# Altium PCB PCB1.PcbDoc
Units mm, origin at the board's own origin, x right, y up, seen from the top; angles counter-clockwise.
Board outline 156.8 x 159.97 mm, 2 copper layers (Top Layer, Bottom Layer); 29 components, 22 nets, 99 pads, 0 vias.
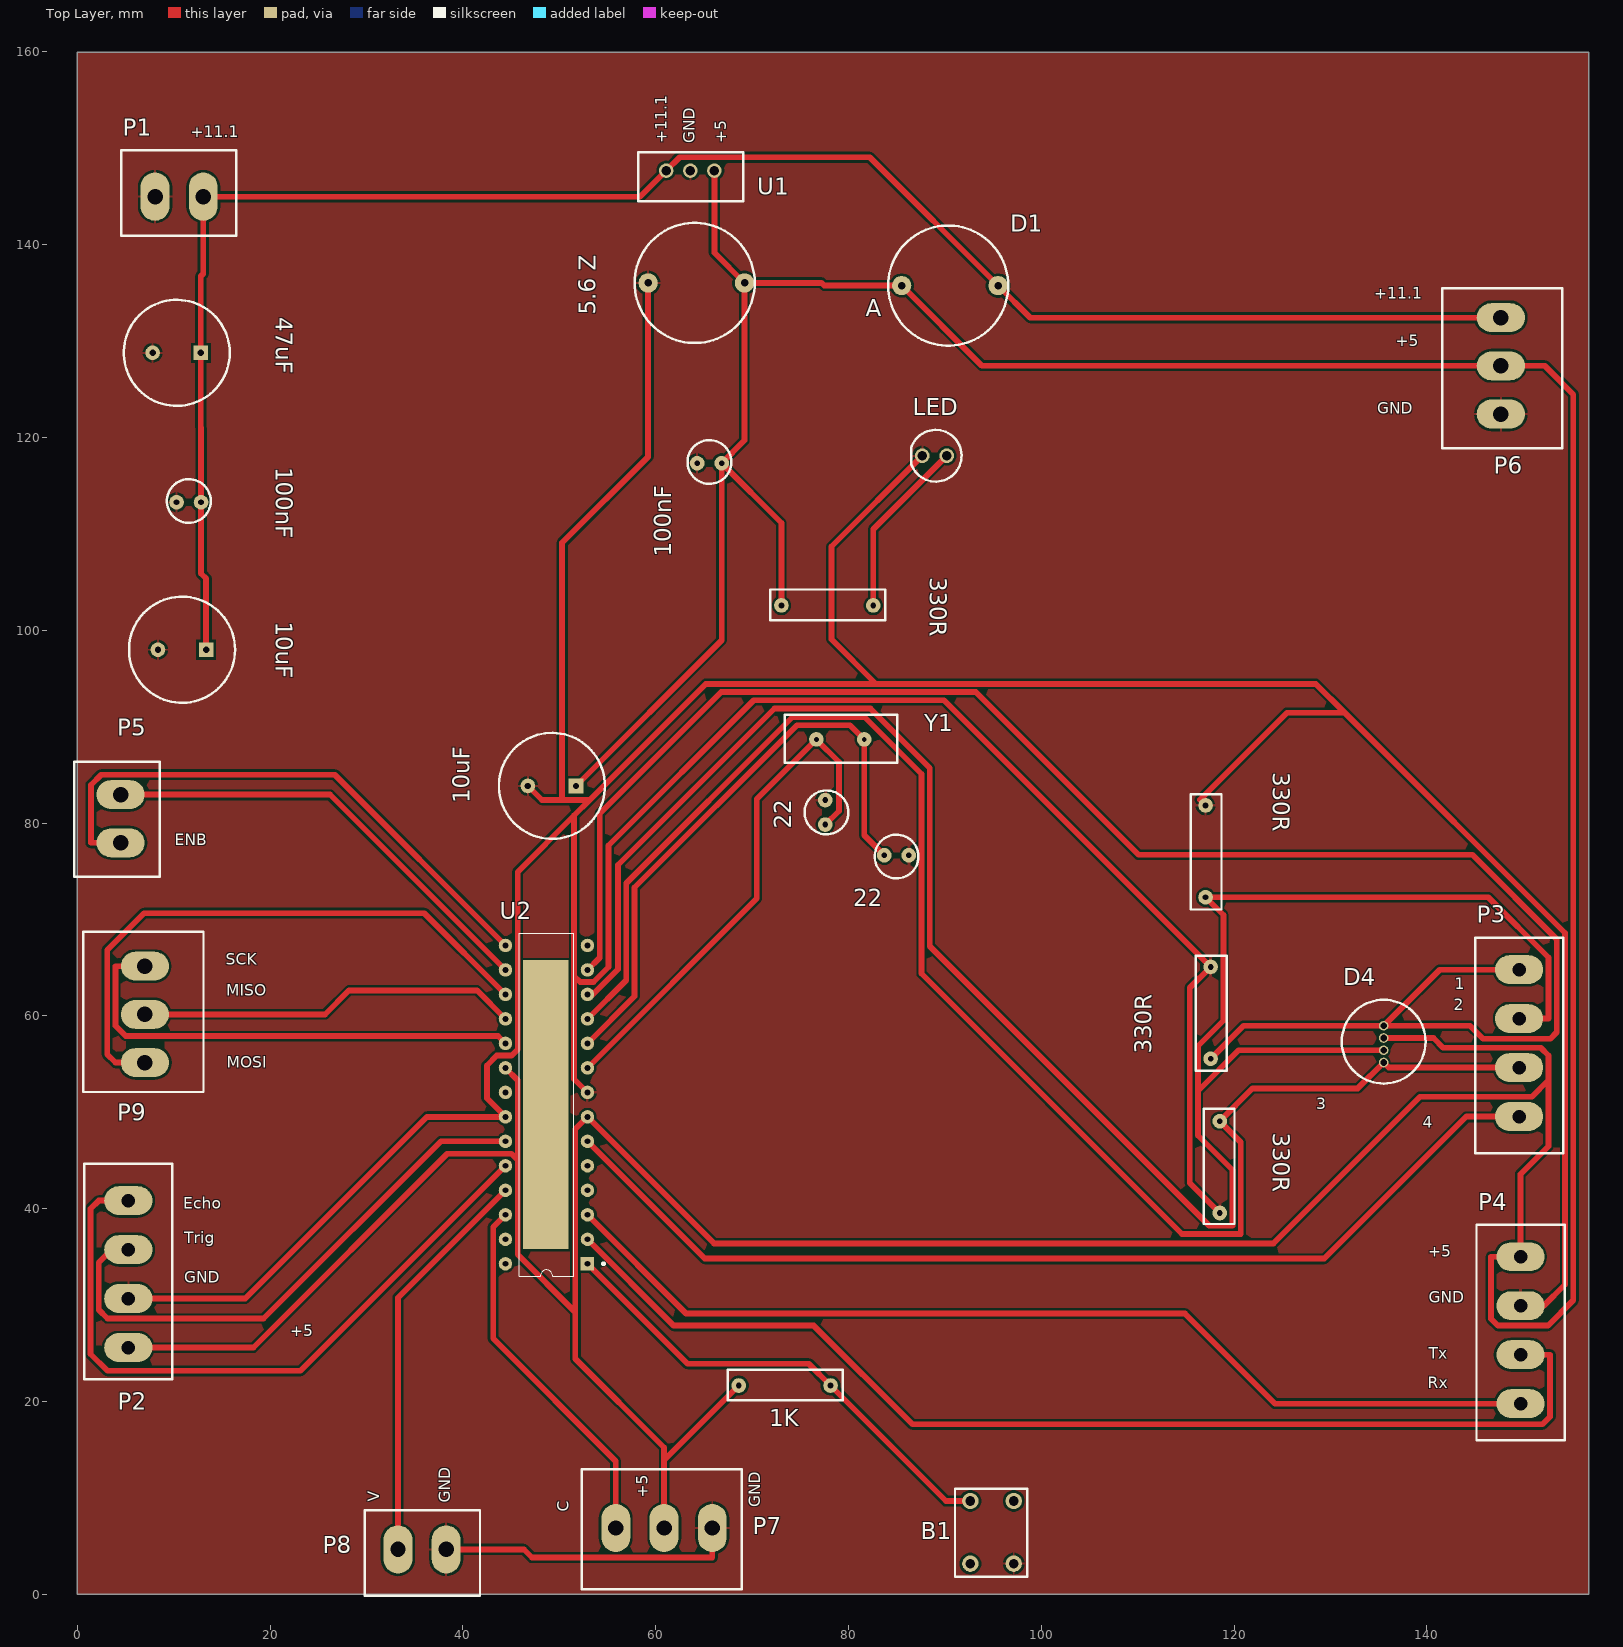
[diagram p0: Top Layer view]
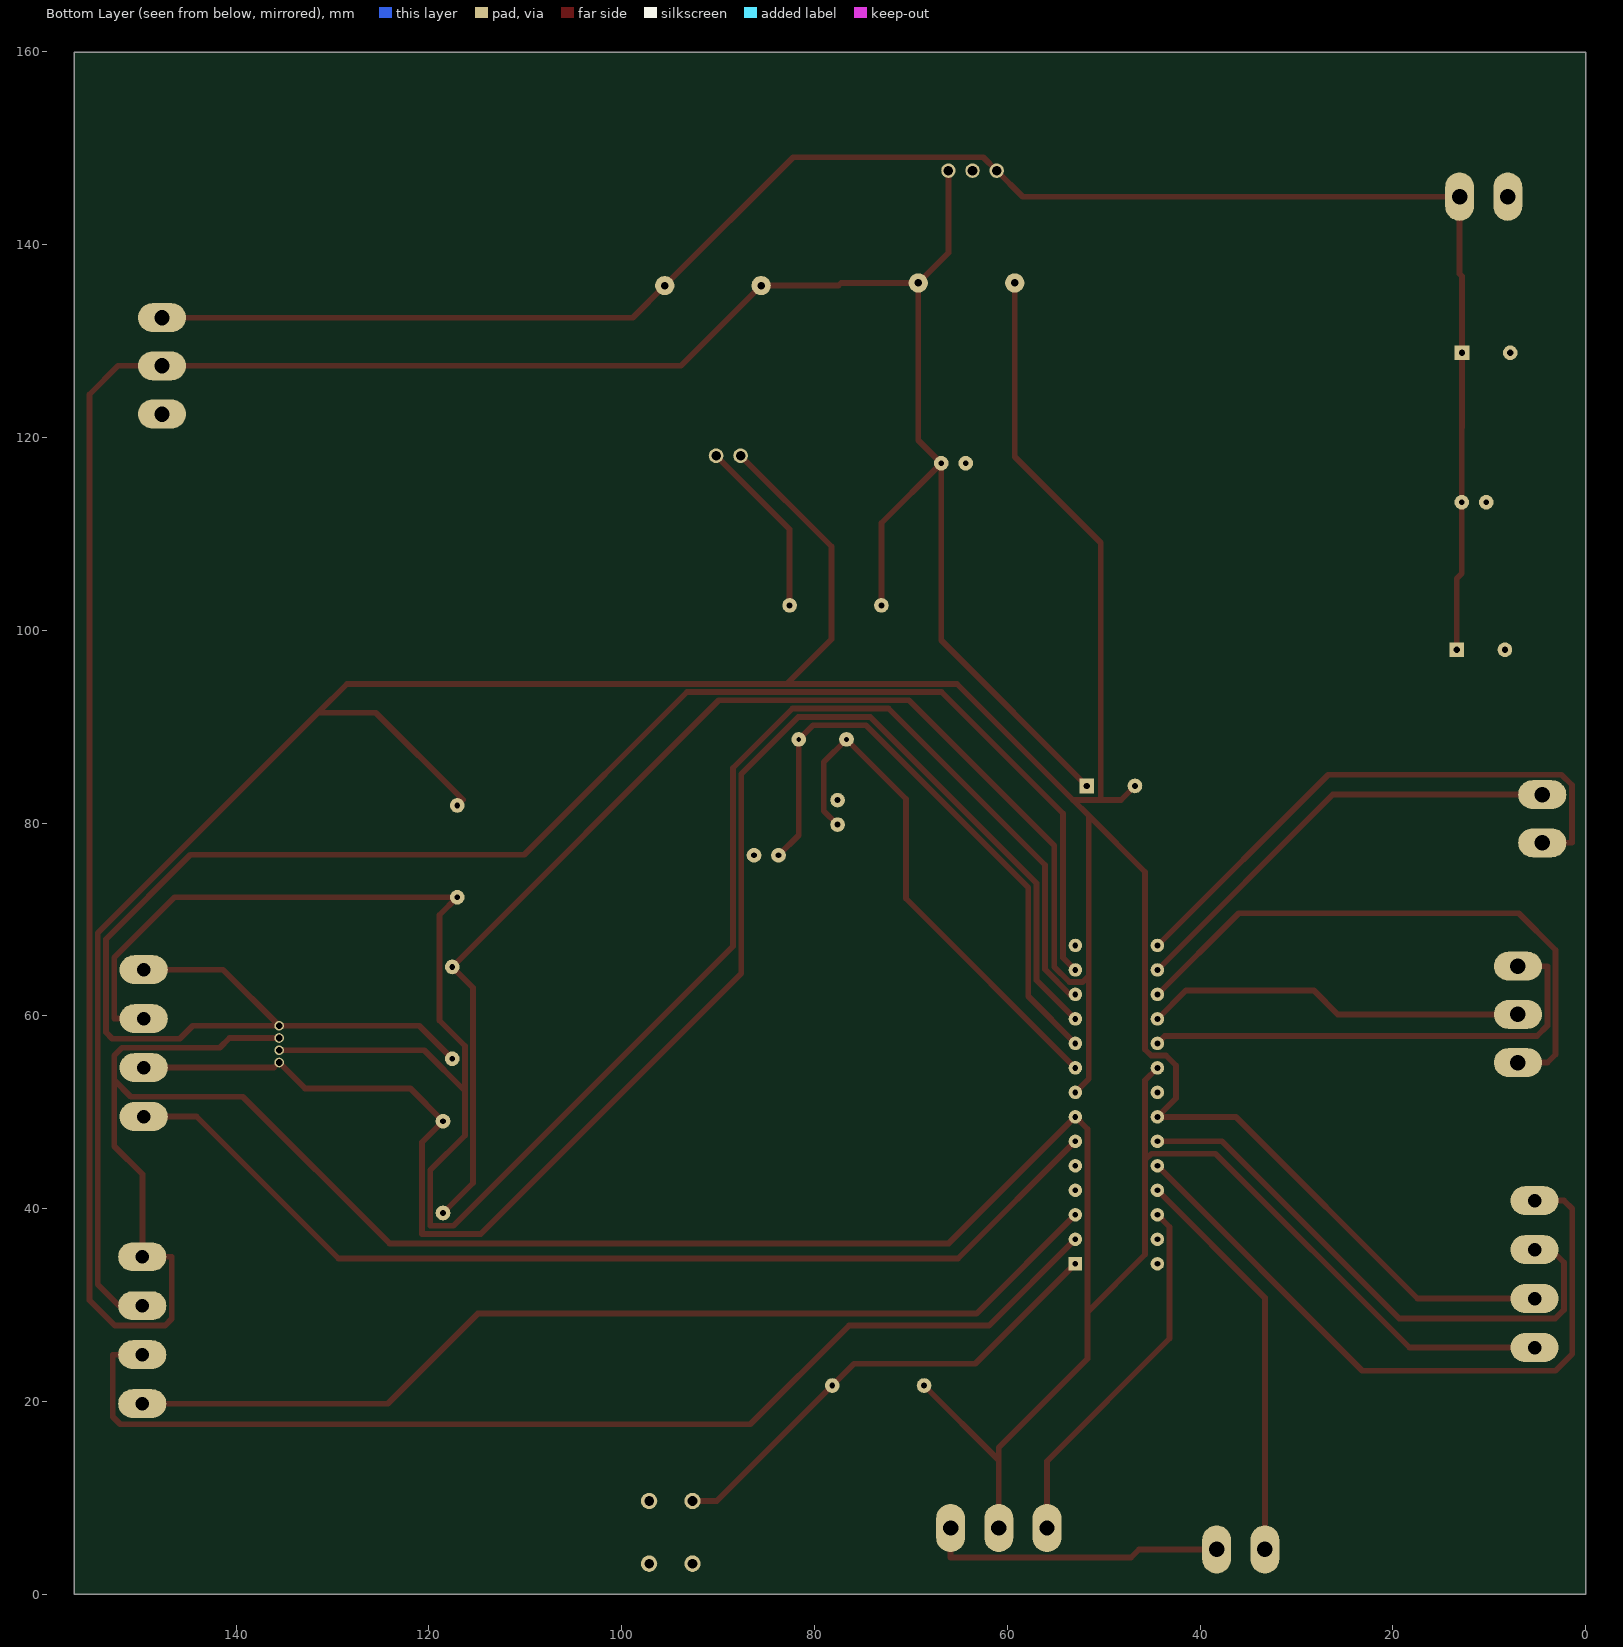
[diagram p1: Bottom Layer view, seen from below]
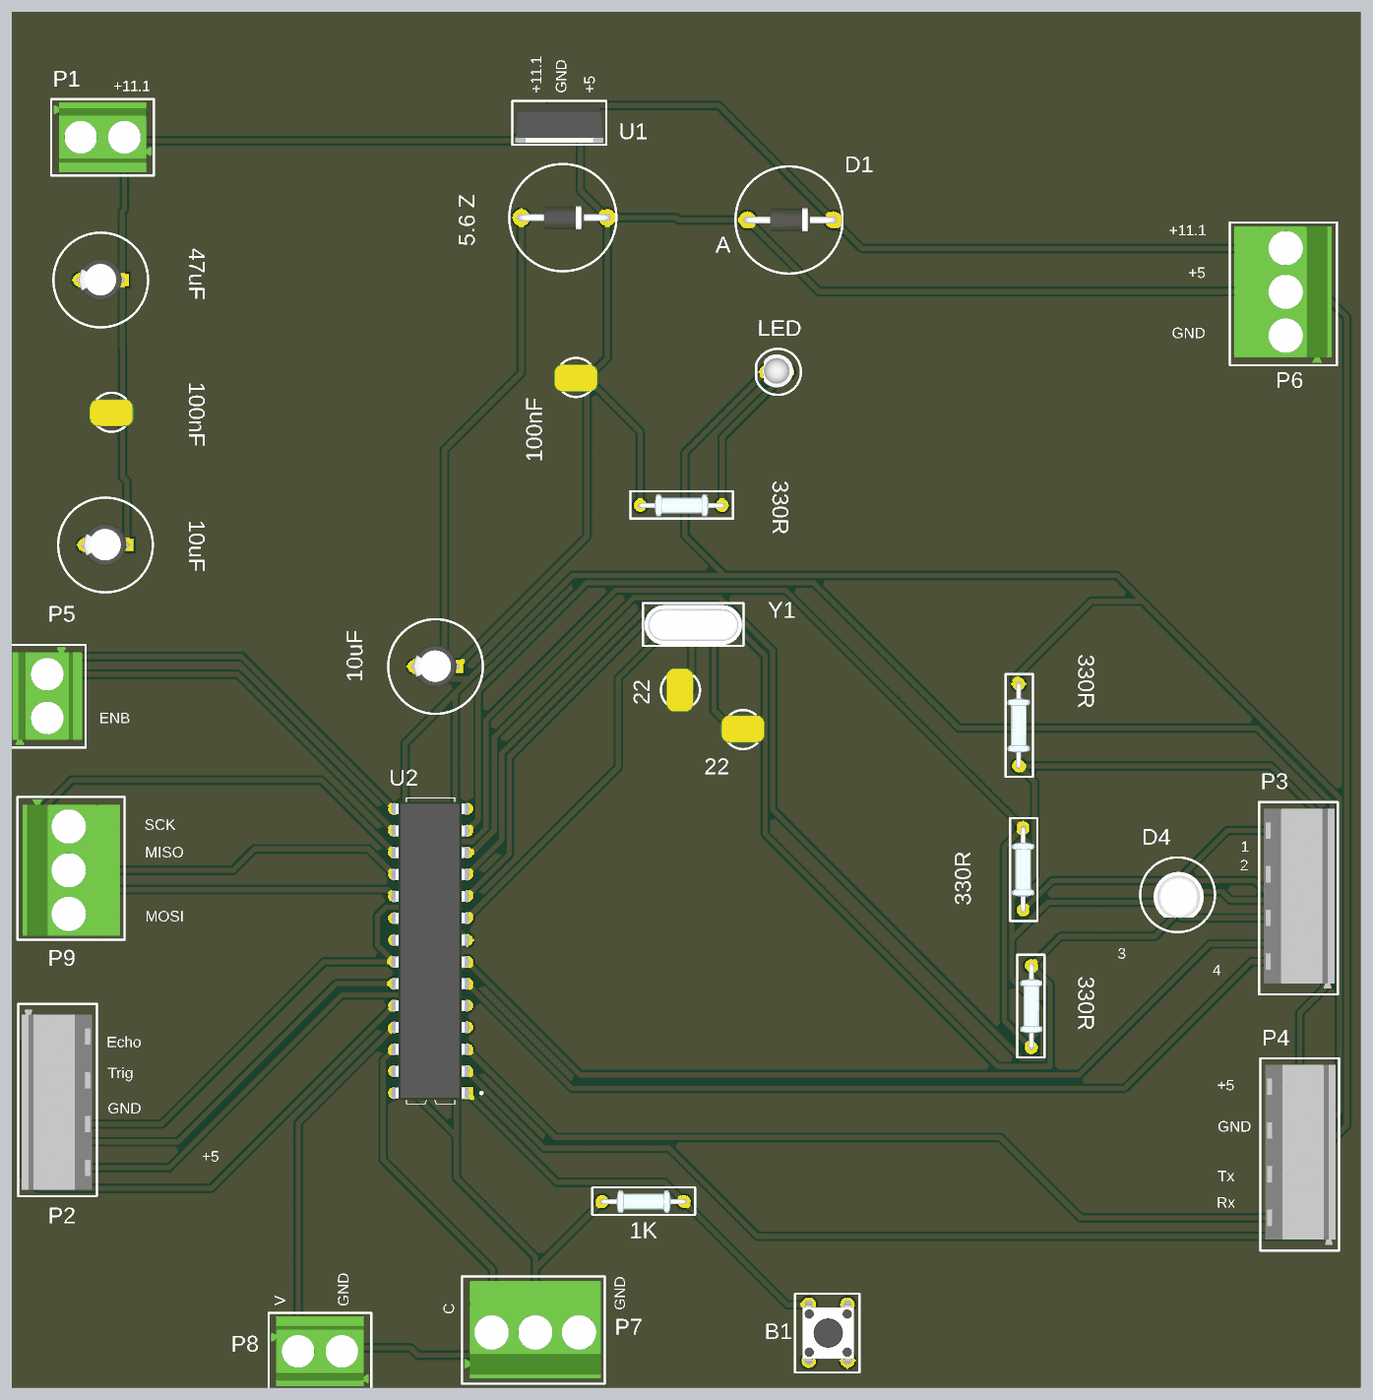
[diagram p2: 3D render of the assembled board from above, using the file's embedded part models]

## Layer stack, top to bottom
Top Solder: solder mask 0.0102, Solder Resist, Dk 3.5
Top Layer: signal copper 0.0356
Dielectric 1: dielectric 0.32, FR-4, Dk 4.8
Bottom Layer: signal copper 0.0356
Bottom Solder: solder mask 0.0102, Solder Resist, Dk 3.5

## Board outline
0,0 156.8,0 156.8,159.975 0,159.975

## Design rules (kind name [scope] priority, off if disabled: settings)
Clearance [All] p1: gap=0.254 ignorepadtopadclearanceinfootprint=TRUE
PolygonConnect [All] p1: connectstyle=Relief reliefconductorwidth=0.254 reliefentries=4 polygonreliefangle="90 Angle" airgapwidth=0.254
RoutingLayers [All] p1: top layer_v5=TRUE bottom layer_v5=FALSE
RoutingVias [All] p1: holewidth=0.711 width=1.27 viastyle="Through Hole" minholewidth=0.711 minwidth=1.27 maxholewidth=0.711 maxwidth=1.27
SolderMaskExpansion [All] p1: expansion=0.102 istentingtop=FALSE
SupplyNets "Schematic Supply Nets_1" [InNet('GND')] p1: voltage=0.000
SupplyNets "Schematic Supply Nets" [InNet('+11.1')] p2: voltage=0.000
Width [All] p1: maxlimit=0.6 minlimit=0.6 preferedwidth=0.6
29 further rules are at their usual default settings.

## Classes and differential pairs
component class Sheet3: 1K "5.6 Z" 10uF 22 47uF 100nF 330R B1 D1 D4 led P1 P2 P3 P4 P5 P6 P7 P8 P9 U1 U2 Y1

## Components (designator, comment, footprint, x,y, rotation, side; value= is the part's Value field where it differs from the comment)
1K "1k" RES 76.625,21.65 r180 top (schematic designator R2)
"5.6 Z" "Zener 5.6" 1N4007 59.225,136.025 r0 top (schematic designator D2)
10uF "10uF" CAP 51.75,83.85 r180 top (schematic designator C3)
10uF "10uF" CAP 13.375,97.975 r180 top (schematic designator C2)
22 "22pF" "CAP 22pF" 77.6,79.835 r90 top (schematic designator C7)
22 "22pF" "CAP 22pF" 83.725,76.65 r0 top (schematic designator C6)
47uF "47uF" CAP 12.825,128.775 r180 top (schematic designator C5)
100nF "CAP 100nF" "CAP 100nF" 66.85,117.325 r180 top (schematic designator C4)
100nF "100nF" "CAP 100nF" 12.85,113.275 r180 top (schematic designator C1)
330R "330R" RES 117.575,57.075 r90 top (schematic designator R5)
330R "330R" RES 117.05,73.825 r90 top (schematic designator R4)
330R "330R" RES 118.525,47.55 r270 top (schematic designator R3)
330R "330R" RES 81.05,102.575 r180 top (schematic designator R1)
B1 "Push Button" "Push Button" 97.15,9.675 r180 top
D1 "1N4007" 1N4007 85.525,135.75 r0 top
D4 "RGB LED" "RGB LED" 135.525,55.16 r90 top
LED "LED" LED 90.2,118.1 r180 top (schematic designator D3)
P1 "Terminal 2 Pin" "Terminal 2 Pin" 13.075,144.975 r180 top
P2 "Terminal Block 4 Pin" "Terminal Block 4 Pin" 5.3,25.59 r90 top
P3 "Terminal Block 4 Pin" "Terminal Block 4 Pin" 149.575,64.79 r270 top
P4 "Terminal Block 4 Pin" "Terminal Block 4 Pin" 149.725,35.01 r270 top
P5 "Terminal 2 Pin" "Terminal 2 Pin" 4.5,82.95 r270 top
P6 "Terminal 3 Pin" "Terminal 3 Pin" 147.675,122.425 r90 top
P7 "Terminal 3 Pin" "Terminal 3 Pin" 55.875,6.875 r0 top
P8 "Terminal 2 Pin" "Terminal 2 Pin" 33.275,4.65 r0 top
P9 "Terminal 3 Pin" "Terminal 3 Pin" 7.025,65.15 r270 top
U1 "7805 Regulator" "7805 Reg" 61.1,147.675 r0 top
U2 "ATmega8" ATmega8A-PU 52.934,34.28 r180 top
Y1 "crystal" crystal 76.675,88.675 r0 top

## Footprints (in the part's own frame and the unit in brackets; to place one, negate y for a bottom-side part, rotate by r counter-clockwise, add the part's x,y. Pads: shape width x height; smd on the part's side, far side on the other; paste and mask are expansions set on the pad)
1N4007 [mm]
  round 2 hole 0.78: 1(0,0) 2(10,0)
  silkscreen extent -1.4,-6.22 11.05,6.22, body extent -0.52,-1.35 10.43,1.35, height 2.68
"7805 Reg" [mm]
  round 1.5 hole 1: 1(0,0) 2(2.5,0) 3(5,0)
  silkscreen extent -2.92,-3.18 8,1.9, body extent -2.56,-2.92 7.64,1.58, height 22.68
ATmega8A-PU [mm]
  rect 1.4x1.4 hole 0.6: 1(0,0)
  round 1.4 hole 0.6: 2(0,-2.54) 3(0,-5.08) 4(0,-7.62) 5(0,-10.16) 6(0,-12.7) 7(0,-15.24) 8(0,-17.78) 9(0,-20.32) 10(0,-22.86) 11(0,-25.4) 12(0,-27.94) 13(0,-30.48) 14(0,-33.02) 15(8.509,-33.02) 16(8.509,-30.48) 17(8.509,-27.94) 18(8.509,-25.4) 19(8.509,-22.86) 20(8.509,-20.32) 21(8.509,-17.78) 22(8.509,-15.24) 23(8.509,-12.7) 24(8.509,-10.16) 25(8.509,-7.62) 26(8.509,-5.08) 27(8.509,-2.54) 28(8.509,0)
  rect 4.7x30 smd: 29(4.318,-16.51)
  silkscreen extent -1.78,-34.29 7.07,1.27, body extent -0.76,-33.85 9.4,0.83, height 4.57
CAP [mil]
  rect 60x60 hole 25.59: 1(0,0)
  round 60 hole 25.59: 2(196.85,0)
  silkscreen extent -118,-216 315,216, body extent -8,-100 208,97, height 492
"CAP 22pF" [mil]
  round 60 hole 23.62: 1(0,0) 2(100,0)
  silkscreen extent -39,-94 139,84, body extent -50,-65 150,60, height 250
"CAP 100nF" [mil]
  round 60 hole 23.62: 1(0,0) 2(100,0)
  silkscreen extent -39,-94 139,84, body extent -50,-65 150,60, height 250
crystal [mil]
  round 60 hole 19.68: 1(0,0) 2(195.28,0)
  silkscreen extent -130,-95 330,100, body extent -123,-92 323,92, height 138
LED [mil]
  round 60 hole 39.37: 1(0,0) 2(100,0)
  silkscreen extent -60,-105 146,105, body extent -25,-80 115,71, height 209
"Push Button" [mm]
  round 1.7 hole 1: 1(0,0) 2(4.5,0) 3(0,6.5) 4(4.5,6.5)
  silkscreen extent -1.4,-1.27 6.1,7.87, body extent -0.76,-0.54 5.25,7.15, height 4.95
RES [mil]
  round 60 hole 23.62: 1(-60,0) 2(314.96,0)
  silkscreen extent -110,-65 360,60, body extent -74,-51 324,51, height 102
"RGB LED" [mm]
  round 1 hole 0.7: 1(0,0) 2(1.27,0) 3(2.54,0) 4(3.81,0)
  silkscreen extent -2.19,-4.34 6.5,4.34, body extent -0.5,-3.05 4.81,2.8, height 11.65
"Terminal 2 Pin" [mm]
  oval 3x5 hole 1.6: 1(0,0) 2(5,0)
  silkscreen extent -3.43,-4.83 8.51,4.06, body extent -3.14,-4.45 8.22,3.65, height 10
"Terminal 3 Pin" [mm]
  oval 3x5 hole 1.6: 1(0,0) 2(5,0) 3(10,0)
  silkscreen extent -3.55,-6.37 13.05,6.08, body extent -3.24,-5.78 12.59,5.58, height 18
"Terminal Block 4 Pin" [mm]
  oval 3x5 hole 1.4: 1(0,0) 2(5.08,0) 3(10.16,0) 4(15.24,0)
  silkscreen extent -3.3,-4.57 19.05,4.57, body extent -2.54,-4.01 18.38,4.19, height 11.25

## Part data
1K 330R 330R 330R 330R: library part RES
"5.6 Z": library part Zener
10uF 10uF 47uF: library part CAP
22 22: library part "CAP 22pF"
100nF: library part "CAP 100nF"

## Nets (pads, with @x,y where several pads share a name; then routed paths per layer and width w, separated by ;. In a path a pad name is that pad's centre, name@x,y a point inside that pad or via, vN(x,y) a via of type N, cw(c..) or ccw(c..) an arc to the next point about the centre after c; other vN are vias at no path point)
+5v: 1K.2 10uF.1@51.75,83.85 100nF.1@66.85,117.325 330R.2@73.05,102.575 "5.6 Z.2" D1.1 D4.3 P2.1 P4.1 P6.2 P7.2 U1.3 U2.7 U2.20 | length 581.2
  Top Layer w0.6: P2.1 18.281,25.59 38.385,45.695 45.04,45.695 45.7,45.034 ; U2.20 45.7,53.325 45.7,45.034 ; 10uF.1@51.75,83.85 66.85,98.95 100nF.1@66.85,117.325 ; P7.2 60.875,13.9 ; U1.3 66.1,139.15 69.225,136.025 ; 1K.2 60.875,13.9 ; 330R.2@73.05,102.575 73.05,111.125 100nF.1@66.85,117.325 ; D4.3 140.68,57.7 141.687,56.693 151.822,56.693 152.634,55.88 152.634,53.34 ; P4.1 P4.1@149.713,35.01 ; 45.7,45.034 45.7,35.23 51.669,29.261 ; 51.669,29.261 51.669,48.255 U2.7 66.056,36.398 124.085,36.398 139.299,51.613 150.907,51.613 152.634,53.34 ; 51.669,29.261 51.669,24.435 60.875,15.229 60.875,13.9 ; 100nF.1@66.85,117.325 69.225,119.7 69.225,136.025 ; 69.225,136.025 77.222,136.025 77.497,135.75 D1.1 93.843,127.432 146.665,127.432 146.665,127.425 P6.2 152.231,127.425 155.196,124.46 155.196,30.502 152.558,27.864 147.377,27.864 146.665,28.575 146.665,35.01 P4.1@149.713,35.01 ; P4.1@149.713,35.01 149.713,43.561 152.634,46.482 152.634,53.34
+11.1: 10uF.1@13.375,97.975 47uF.1 100nF.1@12.85,113.275 D1.2 P1.1 P6.3 U1.1 | length 190.5
  Top Layer w0.6: P1.1 P1.1@13.075,144.958 ; 10uF.1@13.375,97.975 13.375,105.359 12.85,105.884 12.85,113.275 12.85,121.006 12.825,121.031 47uF.1 12.825,136.728 13.075,136.978 P1.1@13.075,144.958 ; P6.3 98.85,132.425 D1.2 82.202,149.073 62.498,149.073 U1.1 58.383,144.958 P1.1@13.075,144.958
Current: P7.1 U2.26 | length 38.3
  Top Layer w0.6: U2.26 43.16,38.095 43.16,26.518 55.875,13.803 P7.1
Echo: P2.4 U2.24 | length 71.9
  Top Layer w0.6: P2.4 2.241,40.83 1.392,39.981 1.392,24.928 3.13,23.19 23.175,23.19 U2.24
ENA: P5.1 U2.16 | length 47.5
  Top Layer w0.6: P5.1 26.235,82.95 U2.16
ENB: P5.2 U2.15 | length 59.8
  Top Layer w0.6: P5.2 1.428,77.95 1.428,83.947 2.495,85.014 26.711,85.014 U2.15
GND: 10uF.2 22.2 47uF.2 100nF.2 330R.2@117.05,81.825 330R.2@117.575,65.075 330R.2@118.525,39.55 "5.6 Z.1" B1.3 LED.2 P1.2 P2.2 P4.2 P6.1 P7.3 P8.2 U1.2 U2.8 U2.22 | length 543.4
  Top Layer w0.6: P2.2 17.442,30.67 36.292,49.52 U2.22 42.5,51.445 42.5,54.849 43.531,55.88 45.065,55.88 45.7,56.515 45.7,74.93 51.542,80.772 ; P8.2 38.275,4.648 46.335,4.648 47.174,3.81 65.875,3.81 P7.3 ; 10uF.2@46.75,83.85 48.202,82.398 50.298,82.398 ; U2.8 51.542,53.452 51.542,64.135 ; 59.225,136.025 59.225,117.995 50.298,109.068 50.298,82.398 ; LED.2 78.238,108.678 78.238,99.06 82.864,94.434 ; 330R.2@117.05,81.825 116.465,82.41 125.495,91.44 131.482,91.44 ; 330R.2@118.525,39.55 115.405,42.67 115.405,62.905 117.575,65.075 89.924,92.726 70.184,92.726 55.125,77.667 55.125,65.072 53.553,63.5 52.177,63.5 51.542,64.135 ; P4.2 152.135,29.93 154.342,32.137 154.342,68.58 131.482,91.44 ; 50.298,82.398 53.168,82.398 ; 51.542,64.135 51.542,80.772 ; 51.542,80.772 53.168,82.398 ; 53.168,82.398 65.204,94.434 82.864,94.434 ; 82.864,94.434 128.489,94.434 131.482,91.44
IN1: 330R.1@117.575,55.551 D4.4 P3.1 U2.13 | length 196.1
  Top Layer w0.6: U2.13 54.209,66.035 54.209,80.983 66.806,93.58 93.218,93.58 110.089,76.708 144.735,76.708 153.488,67.955 153.488,58.293 152.828,57.633 145.827,57.633 144.49,58.97 D4.4 ; 330R.1@117.575,55.551 120.994,58.97 D4.4 ; P3.1 141.345,64.79 D4.4
IN2: 330R.1@117.05,72.301 D4.2 P3.2 U2.12 | length 224.6
  Top Layer w0.6: U2.12 53.481,62.22 56.089,64.828 56.089,75.641 72.32,91.872 82.276,91.872 88.435,85.713 88.435,67.229 117.43,38.234 119.841,38.234 119.841,43.995 116.259,47.577 116.259,52.211 ; D4.2 120.478,56.43 116.259,52.211 ; P3.2 152.634,59.71 152.634,66.04 146.373,72.301 117.05,72.301 118.903,70.448 118.903,59.512 116.259,56.868 116.259,52.211
IN3: 330R.1@118.525,49.074 D4.1 P3.3 U2.11 | length 167.4
  Top Layer w0.6: U2.11 56.953,63.699 56.953,73.762 74.199,91.008 81.667,91.008 87.581,85.094 87.581,64.393 114.611,37.363 120.707,37.363 120.707,46.892 118.525,49.074 121.927,52.476 132.841,52.476 D4.1 136.055,54.63 P3.3
IN4: P3.4 U2.6 | length 107.8
  Top Layer w0.6: U2.6 65.097,34.817 129.369,34.817 144.101,49.55 P3.4
MISO: P9.2 U2.18 | length 39.7
  Top Layer w0.6: P9.2 25.713,60.15 28.205,62.642 41.463,62.642 U2.18
MOSI: P9.3 U2.17 | length 61.5
  Top Layer w0.6: P9.3 3.968,55.15 3.117,56.001 3.117,66.827 6.94,70.65 35.995,70.65 U2.17
NetB1_2: 1K.1 B1.2 U2.1 | length 49.9
  Top Layer w0.6: U2.1 63.313,23.901 75.898,23.901 1K.1 90.124,9.675 B1.2
NetC6_1: 22.1@83.725,76.65 U2.10 Y1.2 | length 62.5
  Top Layer w0.6: U2.10 57.819,62.025 57.819,73.314 74.659,90.154 80.156,90.154 Y1.2 81.635,78.74 22.1@83.725,76.65
NetC7_1: 22.1@77.6,79.835 U2.9 Y1.1 | length 54.3
  Top Layer w0.6: U2.9 70.5,72.166 70.5,82.5 Y1.1 79.025,86.325 79.025,81.26 22.1@77.6,79.835
NetD3_1: 330R.1@82.574,102.575 LED.1 | length 18.7
  Top Layer w0.6: 330R.1@82.574,102.575 82.574,110.474 LED.1
Rx: P4.4 U2.3 | length 104.9
  Top Layer w0.6: U2.3 63.186,29.108 114.915,29.108 124.254,19.77 P4.4
SCK: P9.1 U2.19 | length 50.4
  Top Layer w0.6: P9.1 3.971,65.15 3.971,58.976 5.035,57.912 43.653,57.912 U2.19
Trig: P2.3 U2.23 | length 58.7
  Top Layer w0.6: P2.3 3.587,35.75 2.246,34.409 2.246,29.5 3.146,28.6 19.335,28.6 37.725,46.99 44.425,46.99 U2.23
Tx: P4.3 U2.2 | length 117.6
  Top Layer w0.6: U2.2 61.89,27.864 76.409,27.864 86.645,17.628 151.999,17.628 152.787,18.415 152.787,24.85 P4.3
Voltage: P8.1 U2.25 | length 41.9
  Top Layer w0.6: P8.1 33.275,30.75 U2.25
pads on no net: B1.1 B1.4 U2.4 U2.5 U2.14 U2.21 U2.27 U2.28 U2.29

## Polygon pours and split planes (outlines as drawn)
GND on Top Layer "GND_L01_P001" (solid, pour order 1): 0,0 156.8,0 156.8,159.975 0,159.975

## Silkscreen, mask and mechanical layers (free items; w line width, h text height)
Top Overlay:
  text "+11.1" at 11.775,150.725 h2
  text "+11.1" at 61.55,150.5 h2 r90
  text "GND" at 64.453,150.5 h2 r90
  text "+5" at 67.753,150.5 h2 r90
  text "+11.1" at 134.533,133.95 h2
  text "A" at 81.8,131.975 h3
  text "+5" at 136.766,129.022 h2
  text "GND" at 134.85,122.022 h2
  text "ENB" at 10.125,77.275 h2
  text "SCK" at 15.4,64.872 h2
  text "1" at 142.875,62.325 h2
  text "MISO" at 15.475,61.672 h2
  text "2" at 142.773,60.15 h2
  text "MOSI" at 15.5,54.222 h2
  text "3" at 128.55,49.897 h2
  text "4" at 139.6,47.975 h2
  text "Echo" at 11.025,39.595 h2
  text "Trig" at 11.125,36.001 h2
  text "+5" at 140.125,34.597 h2
  text "GND" at 11.125,31.897 h2
  text "GND" at 140.175,29.797 h2
  text "+5" at 22.075,26.322 h2
  text "Tx" at 140.175,24.025 h2
  text "Rx" at 140.075,20.95 h2
  text "+5" at 59.603,10.025 h2 r90
  text "V" at 31.75,9.577 h2 r90
  text "GND" at 39.128,9.475 h2 r90
  text "GND" at 71.278,9.05 h2 r90
  text "C" at 51.403,8.575 h2 r90